# Altium PCB Sandshark 3D R1.0.PcbDoc (part 2 of 2)
Units mil, origin at the board's own origin, x right, y up, seen from the top; angles counter-clockwise.
Board outline 4143.89 x 2810.03 mil, 5 copper layers (Top Layer, Mid-Layer 1, Groun Plane, Power Plane, Bottom Layer), stack 75.73 mil thick; 278 components, 166 nets, 866 pads, 200 vias.
Unrouted connection lines stored in the file: 346.
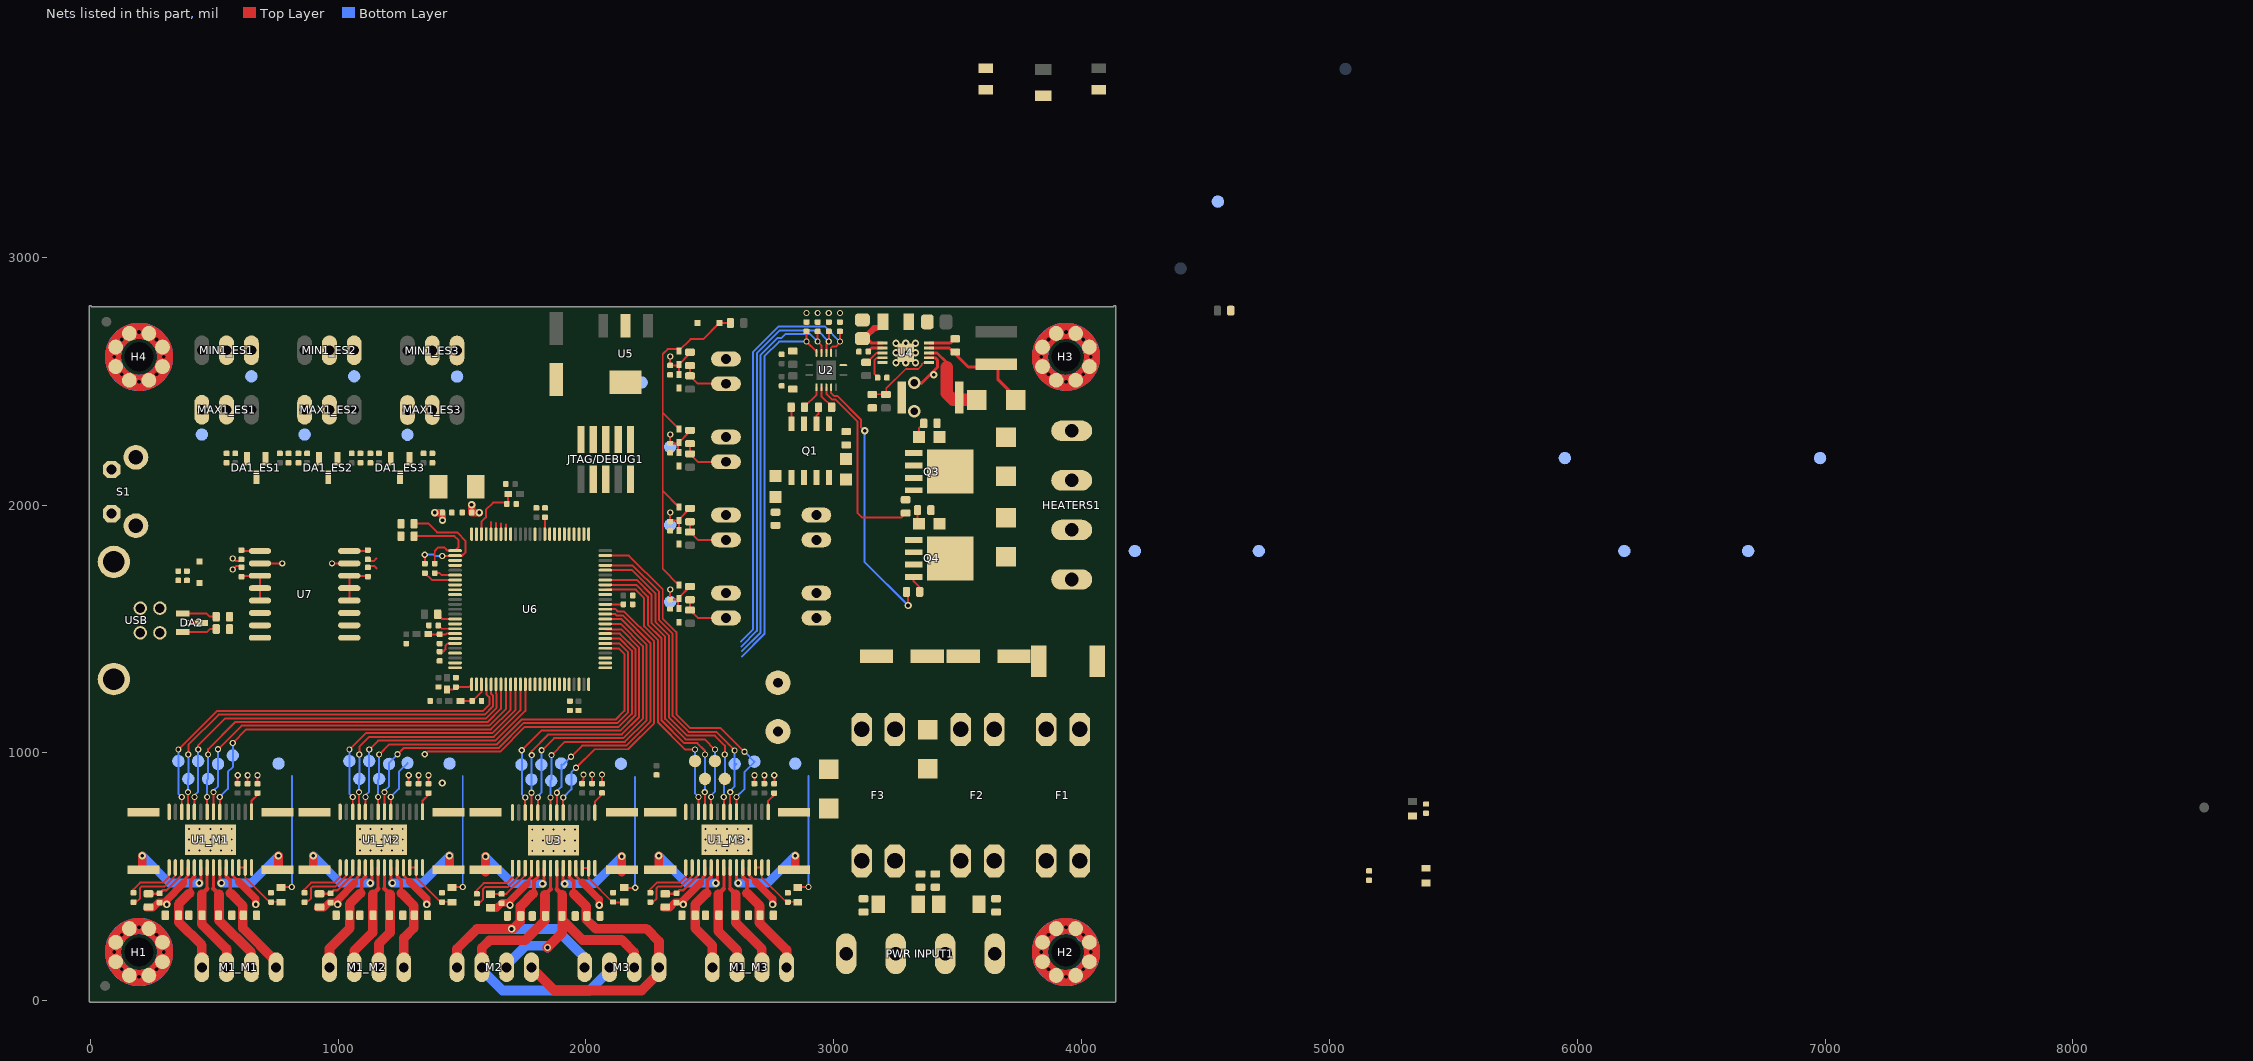
[diagram p4: the nets of this part, all layers, seen from the top]

## Via types
v1: diameter 25, hole 15, Top Layer to Bottom Layer, 91 vias
v2: diameter 19.68, hole 7.87, Top Layer to Bottom Layer, 64 vias
v3: diameter 30, hole 15, Top Layer to Bottom Layer, tented both sides, 34 vias
v4: diameter 30, hole 15, Top Layer to Bottom Layer, 9 vias
v5: diameter 50, hole 30, Top Layer to Bottom Layer, 2 vias

## Nets (pads, with @x,y where several pads share a name; then routed paths per layer and width w, separated by ;. In a path a pad name is that pad's centre, name@x,y a point inside that pad or via, vN(x,y) a via of type N, cw(c..) or ccw(c..) an arc to the next point about the centre after c; other vN are vias at no path point) (continued)
+12VCC1: C3_M1.2 C3_M2.2 C3_M3.2 C17.1 C66.1 D25.C F3.2 R3_M1.2 R3_M2.2 R3_M3.2 R19.2 U1_M1.4 U1_M1.11 U1_M2.4 U1_M2.11 U1_M3.4 U1_M3.11 U3.4 U3.11 | length 1866.1
  Top Layer w12: 375.51,473.74 384.51,482.74 384.51,494.25 394.69,504.42 394.69,536.8 U1_M1.4@394.68,537.8 ; U1_M1.11@573.82,537.8 573.82,505.43 599.25,480 ; 1065.51,473.74 1074.51,482.74 1074.51,494.25 1084.69,504.42 1084.69,536.8 U1_M2.4@1084.68,537.8 ; U1_M2.11@1263.82,537.8 1263.82,505.43 1289.25,480 ; 1761.26,471.38 1770.26,480.38 1770.26,491.89 1780.43,502.06 1780.43,534.43 U3.4@1780.43,535.43 ; U3.11@1959.57,535.43 1959.57,503.07 1985,477.64 ; 2460.51,473.74 2469.51,482.74 2469.51,494.25 2479.69,504.42 2479.69,536.8 U1_M3.4@2479.68,537.8 ; U1_M3.11@2658.82,537.8 2658.82,505.43 2684.25,480
  Top Layer w30: C3_M1.2@227.99,376.18 252.95,376.18 275.51,398.74 297.99,398.74 v3(307.99,388.74) 307.99,406.22 375.51,473.74 ; 599.25,480 667.99,411.26 v3(667.99,388.74) ; C3_M2.2@917.99,376.18 942.95,376.18 965.51,398.74 987.99,398.74 v3(997.99,388.74) 997.99,406.22 1065.51,473.74 ; 1289.25,480 1357.99,411.26 v3(1357.99,388.74) ; C17.1@1613.74,373.82 1638.7,373.82 1661.26,396.38 1683.74,396.38 v3(1693.74,386.38) 1693.74,403.86 1761.26,471.38 ; 1985,477.64 2053.74,408.9 v3(2053.74,386.38) ; C3_M3.2@2312.99,376.18 2337.95,376.18 2360.51,398.74 2382.99,398.74 v3(2392.99,388.74) 2392.99,406.22 2460.51,473.74 ; 2684.25,480 2752.99,411.26 v3(2752.99,388.74)
+12VCC2: C27.1 C29.1 C65.1 D7.C D19.C F2.2 FAN-1.1 FAN-2.1 HEATERS1.4 R7.2 R10.2 R13.2 R23.2 U4.1 | length 128.2
  Top Layer w12: C29.1@3142.87,2662.95 3152.03,2653.8 U4.1@3196.02,2653.8
  Top Layer w24: C29.1@3115.51,2682.02 3130.36,2682.02 3162.77,2714.43 3173.35,2714.43
+12VCC3: C64.1 D10.C D17.C F1.2 HEATERS1.2 R16.2
AN1: C63_U_TR1.1 D23_U_TR1.A D24_U_TR1.C R44_U_TR1.1 TP26_U_TR1.1 | length 180.7
  Top Layer w8: v1(2340,2600) C63_U_TR1.1@2340,2563.7 2371.26,2563.7 D23_U_TR1.A@2375,2567.44 ; D24_U_TR1.C@2375,2527.56 D23_U_TR1.A@2375,2567.44 ; R44_U_TR1.1@2420,2616.77 2420,2612.44 D23_U_TR1.A@2375,2567.44
AN2: C63_U_TR2.1 D23_U_TR2.A D24_U_TR2.C R44_U_TR2.1 TP26_U_TR2.1 | length 167.9
  Top Layer w8: v1(2340,2285) C63_U_TR2.1@2340,2248.7 2371.26,2248.7 D24_U_TR2.C@2371.26,2216.3 ; D23_U_TR2.A@2375,2252.44 2420,2297.44 R44_U_TR2.1@2420,2301.77
AN3: C63_U_TR3.1 D23_U_TR3.A D24_U_TR3.C R44_U_TR3.1 TP26_U_TR3.1 | length 178.2
  Top Layer w8: v1(2340,1660) C63_U_TR3.1@2340,1618.7 2371.26,1618.7 2371.26,1586.3 D24_U_TR3.C@2375,1582.56 ; D23_U_TR3.A@2375,1622.44 2375,1626.77 R44_U_TR3.1@2420,1671.77
AN4: C63_U_TR4.1 D23_U_TR4.A D24_U_TR4.C R44_U_TR4.1 TP26_U_TR4.1 | length 180.7
  Top Layer w8: v1(2340,1970) C63_U_TR4.1@2340,1933.7 2343.74,1937.44 D23_U_TR4.A@2375,1937.44 ; D24_U_TR4.C@2375,1897.56 D23_U_TR4.A@2375,1937.44 ; R44_U_TR4.1@2420,1986.77 2375,1941.77 D23_U_TR4.A@2375,1937.44
DIR1: TP8_M1.1 U1_M1.20 U6.59 | length 1578.5
  Top Layer w8: U1_M1.20@522.64,762.2 v1(522.64,822.64) ; v1(575,1040) 630,1095 1616.21,1095 1696.26,1175.05 U6.59@1696.26,1276.85
  Bottom Layer w8: v1(522.64,822.64) 555.48,855.48 555.48,923.71 575,943.23 TP8_M1.1@575,990 v1(575,1040)
DIR2: TP8_M2.1 U1_M2.20 U6.82 | length 1509.9
  Top Layer w8: U1_M2.20@1212.64,762.2 v1(1212.64,822.64) ; v1(1350,995) 1360,1005 1653.64,1005 1753.64,1105 2132.43,1105 2185,1157.57 2185,1412.72 2135.83,1461.89 U6.82@2078.15,1461.89
  Bottom Layer w8: v1(1212.64,822.64) 1245.48,855.48 1245.48,923.71 TP8_M2.1@1280.89,959.11
DIR3: TP8_M3.1 U1_M3.20 U6.99 | length 1441.5
  Top Layer w8: U6.99@2078.15,1796.54 2173.46,1796.54 2310,1660 2310,1542.28 2365,1487.28 2365,1156.07 2421.07,1100 2543.23,1100 2638.23,1005 v1(2640,1005) ; U1_M3.20@2607.64,762.2 v1(2607.64,822.64)
  Bottom Layer w8: v1(2607.64,822.64) 2640.48,855.48 2640.48,923.71 TP8_M3.1@2680.89,964.11 ; v1(2640,1005) TP8_M3.1@2680,965
DIR_Z: TP21.1 U3.20 U6.88 | length 1173.5
  Top Layer w8: U3.20@1908.39,759.84 v1(1908.39,820.28) ; v1(1960,940) 2035,1015 2169.71,1015 2275,1120.29 2275,1450 2154.37,1570.63 2129.37,1570.63 2120,1580 U6.88@2078.15,1580
  Bottom Layer w8: v1(1908.39,820.28) 1941.23,853.12 1941.23,921.35 v1@1961.26,941.38
EN1: TP4_M1.1 U1_M1.21 U6.58 | length 1589.1
  Top Layer w8: U1_M1.21@497.05,762.2 v1(497.05,842.05) ; v1@515.48,1014.52 610.96,1110 1610,1110 1676.57,1176.57 U6.58@1676.57,1276.85
  Bottom Layer w8: v1(497.05,842.05) 497.05,847.34 515.48,865.77 TP4_M1.1@515.48,955.77 515.48,1014.52 v1(515,1015)
EN2: TP4_M2.1 U1_M2.21 U6.81 | length 1604
  Top Layer w8: U1_M2.21@1187.05,762.2 v1(1187.05,842.05) ; v1(1240,995) 1265,1020 1647.43,1020 1747.43,1120 2126.21,1120 2170,1163.79 2170,1406.51 2134.3,1442.2 U6.81@2078.15,1442.2
  Bottom Layer w8: v1(1187.05,842.05) 1187.05,847.34 1205.48,865.77 TP4_M2.1@1205.48,955.77 1205.48,960.48 v1(1240,995)
EN3: TP4_M3.1 U1_M3.21 U6.97 | length 1366.4
  Top Layer w8: U6.97@2078.15,1757.17 2187.69,1757.17 2295,1649.85 2295,1536.07 2350,1481.07 2350,1149.85 2414.85,1085 2526.21,1085 2575.51,1035.7 2575.51,1034.49 v1(2600,1010) ; U1_M3.21@2582.05,762.2 v1(2582.05,842.05)
  Bottom Layer w8: v1(2582.05,842.05) 2582.05,847.34 2600.48,865.77 TP4_M3.1@2600.48,955.77 ; v1(2600,1010) 2600,948.23 TP4_M3.1@2607.54,955.77
EN_Z: TP17.1 U3.21 U6.87 | length 1173.8
  Top Layer w8: U3.21@1882.8,759.84 v1(1882.8,839.68) ; v1(1940,985) 1985,1030 2163.49,1030 2260,1126.51 2260,1443.79 2148.16,1555.63 2123.16,1555.63 2118.47,1560.32 U6.87@2078.15,1560.32
  Bottom Layer w8: v1(1882.8,839.68) 1882.8,844.98 1901.23,863.41 TP17.1@1901.23,953.41 ; TP17.1@1908.29,953.41 v1@1941.26,986.38
EXP1_CS: U6.8
EXP2_CS: U6.9
FAN0_PWM: R9.2 U2.2 U6.49 | length 1546.1
  Top Layer w8: R9.2@2890,2701 v1(2890,2660) 2930.63,2619.37 U2.2@2930.63,2613.9
  Bottom Layer w8: 2630,1390 2720,1480 2720,2600 2780,2660 v1(2890,2660)
FAN1_PWM: R12.2 U2.3 U6.50 | length 1597.5
  Top Layer w8: R12.2@2935,2701 v1(2935,2660) 2950.32,2644.68 U2.3@2950.32,2613.9
  Bottom Layer w8: 2629.39,1410.61 2705,1486.21 2705,2606.21 2773.79,2675 2790,2675 2805,2690 2905,2690 v1(2935,2660)
FGND: D22.C H1.1 H2.1 H3.1 H4.1 S1.3 S1.4 | length 12
  Bottom Layer w40: 3862.76,122.6 H2.1@3867.01,126.85
  Bottom Layer w64.96: H2.1@4007.01,266.85 4011.25,271.1
GND: "PWR INPUT1.2" "PWR INPUT1.4" C1_ES1.2 C1_ES2.2 C1_ES3.2 C2_ES1.2 C2_ES2.2 C2_ES3.2 C5_M1.1 C5_M2.1 C5_M3.1 C6_M1.1 C6_M2.1 C6_M3.1 C7_M1.2 C7_M2.2 C7_M3.2 C8_M1.2 C8_M2.2 C8_M3.2 C9_M1.2 C9_M2.2 C9_M3.2 C10_M1.2 C10_M2.2 C10_M3.2 C11_M1.2 C11_M2.2 C11_M3.2 C12_M1.2 C12_M2.2 C12_M3.2 C13.1 C14.1 C15.1 C16.1 C19.1 C20.2 C21.2 C22.2 C23.2 C24.2 C25.2 C26.2 C27.2 C29.2 C30.2 C31.2 C32.2 C33.2 C34.1 C36.1 C37.1 C38.2 C40.1 C41.1 C42.1 C43.1 C44.1 C45.1 C46.1 C47.1 C48.1 C49.1 C50.1 C51.1 C52.1 C53.1 C54.1 C55.1 C56.1 C57.2 C58.2 C62.2 C63_U_TR1.2 C63_U_TR2.2 C63_U_TR3.2 C63_U_TR4.2 C64.2 C65.2 C66.2 C67.2 C68.2 C69.2 C70.2 D17.A D18.A D19.A D20.1 D24_U_TR1.A D24_U_TR2.A D24_U_TR3.A D24_U_TR4.A D25.A DA1_ES1.3 DA1_ES2.3 DA1_ES3.3 JTAG/DEBUG1.3 JTAG/DEBUG1.5 JTAG/DEBUG1.9 MAX1_ES1.2 MAX1_ES2.2 MAX1_ES3.2 MIN1_ES1.2 MIN1_ES2.2 MIN1_ES3.2 P2_U_TR1.2 P2_U_TR2.2 P2_U_TR3.2 P2_U_TR4.2 Q1.1 Q1.3 Q3.1 Q3.2 Q3.3 Q4.1 Q4.2 Q4.3 R5_M1.1 R5_M2.1 R5_M3.1 R6_M1.1 R6_M2.1 R6_M3.1 R9.1 R12.1 R15.1 R18.1 R21.1 R22.1 R26.1 R28.2 R35.1 S1.2 U1_M1.14 U1_M1.28 U1_M1.29 U1_M2.14 U1_M2.28 U1_M2.29 U1_M3.14 U1_M3.28 U1_M3.29 U2.7 U3.14 U3.28 U3.29 U4.5 U4.7 U4.11 U5.2 U5.4 U6.12 U6.22 U6.33 U6.35 U6.41 U6.44 U6.52 U6.73 U6.91 U7.9 U7.15 | length 861
  Top Layer w8: C11_M1.2@594.69,876.2 594.69,909.68 v1(595,910) ; C10_M1.2@634.69,876.2 634.69,909.68 v1(635,910) ; C5_M1.1@675,876.52 v1(675,910) ; v1(975,1765) U7.15@1045.12,1765 ; C57.2@1120,1749 1126,1755 1145,1755 1155,1745 ; C58.2@1120,1781 1126,1775 1145,1775 1155,1785 ; C11_M2.2@1284.69,876.2 1284.69,909.69 v1(1285,910) ; C10_M2.2@1324.69,876.2 1324.69,909.69 v1(1325,910) ; C5_M2.1@1365,876.52 v1(1365,910) ; C24.2@1985,876.64 1985,887.64 1990,892.64 v1(1990,912.64) ; C25.2@2025,876.64 v1(2025,912.64) ; C19.1@2065,876.34 v1(2065,912.64) ; C11_M3.2@2679.69,876.2 2679.69,909.69 v1(2680,910) ; C10_M3.2@2719.69,876.2 2719.69,909.69 v1(2720,910) ; C5_M3.1@2760,876.52 v1(2760,910)
  Top Layer w12: 3353.61,2491.41 3418.08,2555.87 3418.08,2586.35 3409.68,2594.74 U4.7@3385,2594.74 U4.7@3375.16,2594.74
  Top Layer w30: v3(1390,1970) C36.1@1421.3,1970 v3(1421.3,1938.7) ; v3(1538.7,2001.3) C37.1@1538.7,1970 v3(1570,1970)
  other v1: 2890,2775 2935,2775 2980,2775 3025,2775
  other v2: 1783.39,604.33 1826.69,604.33 1870,604.33 1913.31,604.33 1956.61,604.33 397.64,606.69 440.94,606.69 484.25,606.69 527.56,606.69 570.87,606.69 1087.64,606.69 1130.94,606.69 1174.25,606.69 1217.56,606.69 1260.87,606.69 2482.64,606.69 2525.94,606.69 2569.25,606.69 2612.56,606.69 2655.87,606.69 1783.39,647.64 1826.69,647.64 1870,647.64 1913.31,647.64 1956.61,647.64 397.64,650 440.94,650 484.25,650 527.56,650 570.87,650 1087.64,650 1130.94,650 1174.25,650 1217.56,650 1260.87,650 2482.64,650 2525.94,650 2569.25,650 2612.56,650 2655.87,650 1783.39,690.95 1826.69,690.95 1870,690.95 1913.31,690.95 1956.61,690.95 397.64,693.31 440.94,693.31 484.25,693.31 527.56,693.31 570.87,693.31 1087.64,693.31 1130.94,693.31 1174.25,693.31 1217.56,693.31 1260.87,693.31 2482.64,693.31 2525.94,693.31 2569.25,693.31 2612.56,693.31 2655.87,693.31
  other v3: 1420.51,878.74 3403.2,2526
  other v4: 3251.14,2575.06 3290.51,2575.06 3329.88,2575.06 3251.14,2614.43 3290.51,2614.43 3329.88,2614.43 3251.14,2653.8 3290.51,2653.8 3329.88,2653.8
  other v5: 3325.51,2379.43 3325.51,2494.43
HEATBED_PWM: R18.2 U2.5 U6.7 | length 1716.1
  Top Layer w8: U2.5@2989.69,2613.9 2989.69,2634.69 2995.65,2640.65 3010.65,2640.65 3025,2655 v1(3025,2660) R18.2@3025,2701
  Bottom Layer w8: 2626.36,1450 2675,1498.64 2675,2618.64 2776.36,2720 2965,2720 v1(3025,2660)
HEATER_PWM: R15.2 U2.4 U6.17 | length 1631.5
  Top Layer w8: U2.4@2970,2613.9 2970,2650 ; v1(2980,2660) R15.2@2980,2701
  Bottom Layer w8: 2628.18,1430.61 2690,1492.43 2690,2612.43 2782.57,2705 2935,2705 v1(2980,2660)
I2C_SCL: U6.65
I2C_SDA: U6.64
INPUT_GND: C59.2 C60.2 C61.1 DA2.3 R42.1 U7.2 U7.8 USB.4 | length 227.8
  Top Layer w8: v1(395,1525) DA2.3@447.4,1525 ; v1(575,1740) 590,1755 604,1755 C60.2@610,1749 ; v1(575,1785) 585,1775 600,1775 606,1781 C59.2@610,1781 ; U7.2@684.88,1765 v1(775,1765)
MAX_ES1: C2_ES1.1 DA1_ES1.2 MAX1_ES1.1 R2_ES1.1 TP2_ES1.1 U6.2
MAX_ES2: C2_ES2.1 DA1_ES2.2 MAX1_ES2.1 R2_ES2.1 TP2_ES2.1 U6.4
MAX_ES3: C2_ES3.1 DA1_ES3.2 MAX1_ES3.1 R2_ES3.1 TP2_ES3.1 U6.6
MIN_ES1: C1_ES1.1 DA1_ES1.1 MIN1_ES1.1 R1_ES1.1 TP1_ES1.1 U6.1
MIN_ES2: C1_ES2.1 DA1_ES2.1 MIN1_ES2.1 R1_ES2.1 TP1_ES2.1 U6.3
MIN_ES3: C1_ES3.1 DA1_ES3.1 MIN1_ES3.1 R1_ES3.1 TP1_ES3.1 U6.5
MOD0E1: TP7_M1.1 U1_M1.24 U6.56 | length 1637.6
  Top Layer w8: U1_M1.24@420.28,762.2 v1(420.28,822.64) ; v1(435.51,1013.74) 435.51,1030.51 545,1140 1597.57,1140 1640,1182.43 1640,1237.43 1637.2,1240.22 U6.56@1637.2,1276.85
  Bottom Layer w8: v1(420.28,822.64) 420.28,828.57 435.48,843.77 v1(435.51,1013.74)
MOD0E2: TP7_M2.1 U1_M2.24 U6.62 | length 1059
  Top Layer w8: U1_M2.24@1110.28,762.2 v1(1110.28,822.64) ; v1(1125.51,1013.74) 1161.77,1050 1635,1050 1755.32,1170.32 U6.62@1755.32,1276.85
  Bottom Layer w8: v1(1110.28,822.64) 1110.28,828.57 1125.48,843.77 v1(1125.51,1013.74)
MOD0E3: TP7_M3.1 U1_M3.24 U6.94 | length 1244.3
  Top Layer w8: U6.94@2078.15,1698.11 2204.32,1698.11 2265,1637.43 2265,1523.64 2320,1468.64 2320,1137.43 2402.43,1055 2479.25,1055 v1(2520.51,1013.74) ; U1_M3.24@2505.28,762.2 v1(2505.28,822.64)
  Bottom Layer w8: v1(2505.28,822.64) 2505.28,828.57 2520.48,843.77 v1(2520.51,1013.74)
MOD0E_Z: TP20.1 U3.24 U6.85 | length 1200.8
  Top Layer w8: U3.24@1806.02,759.84 v1(1806.02,820.28) ; v1(1821.26,1011.38) 1823.32,1011.38 1871.94,1060 2151.07,1060 2230,1138.93 2230,1431.36 2140.42,1520.94 U6.85@2078.15,1520.94
  Bottom Layer w8: v1(1806.02,820.28) 1806.02,826.2 1821.23,841.41 v1@1821.23,1011.35
MOD1E1: TP6_M1.1 U1_M1.25 U6.55 | length 1654.9
  Top Layer w8: U1_M1.25@394.68,762.2 v1(394.69,842.05) ; v1(395.51,993.74) 395.51,1032.53 517.99,1155 1591.21,1155 1625,1188.79 1625,1231.21 1617.52,1238.69 U6.55@1617.52,1276.85
  Bottom Layer w8: v1(394.69,842.05) TP6_M1.1@394.69,894.98 ; TP6_M1.1@395.48,895.77 v1(395.51,993.74)
MOD1E2: TP6_M2.1 U1_M2.25 U6.61 | length 1078.2
  Top Layer w8: U1_M2.25@1084.68,762.2 v1(1084.69,842.05) ; v1(1085.51,993.74) 1085.51,1025.51 1125,1065 1628.79,1065 1735.63,1171.84 U6.61@1735.63,1276.85
  Bottom Layer w8: v1(1084.69,842.05) TP6_M2.1@1084.69,894.98 ; TP6_M2.1@1085.48,895.77 v1(1085.51,993.74)
MOD1E3: TP6_M3.1 U1_M3.25 U6.93 | length 1186.6
  Top Layer w8: U6.93@2078.15,1678.43 2202.79,1678.43 2250,1631.21 2250,1517.43 2305,1462.43 2305,1131.21 2396.21,1040 2450,1040 2480.51,1009.49 v1(2480.51,993.74) ; U1_M3.25@2479.68,762.2 v1(2479.69,842.05)
  Bottom Layer w8: v1(2479.69,842.05) 2479.69,894.98 ; 2480.48,895.77 v1(2480.51,993.74)
MOD1E_Z: TP19.1 U3.25 U6.84 | length 1182
  Top Layer w8: U3.25@1780.43,759.84 v1(1780.43,839.68) ; v1(1781.26,991.38) 1781.26,1007.37 1848.89,1075 2144.85,1075 2215,1145.15 2215,1425.15 2141.67,1498.48 U6.84@2080.93,1498.48
  Bottom Layer w8: v1(1780.43,839.68) TP19.1@1780.43,892.61 ; TP19.1@1781.23,893.41 v1@1781.23,991.35
MOD2E1: TP5_M1.1 U1_M1.26 U6.54 | length 1673.6
  Top Layer w8: v1(355.51,1013.74) 511.77,1170 1585,1170 1610,1195 1610,1225 1597.83,1237.17 U6.54@1597.83,1276.85 ; U1_M1.26@369.09,762.2 v1(369.09,822.64)
  Bottom Layer w8: v1(355.51,1013.74) 355.48,836.25 v1(369.09,822.64)
MOD2E2: TP5_M2.1 U1_M2.26 U6.60 | length 1097.1
  Top Layer w8: v1(1045.51,1013.74) 1111.77,1080 1622.43,1080 1715.94,1173.52 U6.60@1715.94,1276.85 ; U1_M2.26@1059.09,762.2 v1(1059.09,822.64)
  Bottom Layer w8: v1(1045.51,1013.74) 1045.48,836.25 v1(1059.09,822.64)
MOD2E3: TP5_M3.1 U1_M3.26 U6.92 | length 1147.3
  Top Layer w8: U6.92@2078.15,1658.74 2201.26,1658.74 2235,1625 2235,1511.21 2290,1456.21 2290,1125 2401.26,1013.74 v1(2440.51,1013.74) ; U1_M3.26@2454.09,762.2 v1(2454.09,822.64)
  Bottom Layer w8: v1(2440.51,1013.74) 2440.48,836.25 v1(2454.09,822.64)
MOD2E_Z: TP18.1 U3.26 U6.83 | length 1189.2
  Top Layer w8: v1(1741.26,1011.38) 1819.88,1090 2138.64,1090 2200,1151.36 2200,1418.93 2137.36,1481.57 U6.83@2078.15,1481.57 ; U3.26@1754.84,759.84 v1(1754.84,820.28)
  Bottom Layer w8: v1@1741.23,1011.35 1741.23,833.89 v1(1754.84,820.28)
NetC3_M1_1: C3_M1.1 R3_M1.1 U1_M1.3 | length 192.4
  Top Layer w10: C3_M1.1@235,431.77 R3_M1.1@277.87,431.77 ; R3_M1.1@280,433.9 291.86,445.76 306.72,445.76 369.09,508.13 U1_M1.3@369.09,537.8
NetC3_M2_1: C3_M2.1 R3_M2.1 U1_M2.3 | length 192.4
  Top Layer w10: C3_M2.1@925,431.77 R3_M2.1@967.87,431.77 ; R3_M2.1@970,433.9 981.86,445.76 996.72,445.76 1059.09,508.13 U1_M2.3@1059.09,537.8
NetC3_M3_1: C3_M3.1 R3_M3.1 U1_M3.3 | length 192.4
  Top Layer w10: C3_M3.1@2320,431.77 R3_M3.1@2362.87,431.77 ; R3_M3.1@2365,433.9 2376.86,445.76 2391.72,445.76 2454.09,508.13 U1_M3.3@2454.09,537.8
NetC4_M1_1: C4_M1.1 U1_M1.1 | length 219.5
  Top Layer w8: C4_M1.1@172.99,432.44 172.99,448.31 201.44,476.76 293.88,476.76 317.91,500.79 U1_M1.1@317.91,537.8
NetC4_M1_2: C4_M1.2 U1_M1.2 | length 273.2
  Top Layer w8: C4_M1.2@172.99,394.74 182.22,394.74 199.69,412.2 199.69,453.78 207.66,461.76 300.1,461.76 343.5,505.16 U1_M1.2@343.5,537.8
NetC4_M2_1: C4_M2.1 U1_M2.1 | length 219.5
  Top Layer w8: C4_M2.1@862.99,432.44 862.99,448.31 891.44,476.76 983.88,476.76 1007.91,500.79 U1_M2.1@1007.91,537.8
NetC4_M2_2: C4_M2.2 U1_M2.2 | length 273.2
  Top Layer w8: C4_M2.2@862.99,394.74 872.22,394.74 889.69,412.2 889.69,453.79 897.66,461.76 990.1,461.76 1033.5,505.16 U1_M2.2@1033.5,537.8
NetC4_M3_1: C4_M3.1 U1_M3.1 | length 219.5
  Top Layer w8: C4_M3.1@2257.99,432.44 2257.99,448.31 2286.44,476.76 2378.88,476.76 2402.91,500.79 U1_M3.1@2402.91,537.8
NetC4_M3_2: C4_M3.2 U1_M3.2 | length 273.2
  Top Layer w8: C4_M3.2@2257.99,394.74 2267.22,394.74 2284.69,412.2 2284.69,453.79 2292.66,461.76 2385.1,461.76 2428.5,505.16 U1_M3.2@2428.5,537.8
NetC5_M1_2: C5_M1.2 U1_M1.15 | length 88.9
  Top Layer w8: U1_M1.15@650.59,762.2 650.59,806.34 677.99,833.74 C5_M1.2@677.99,839.74
NetC5_M2_2: C5_M2.2 U1_M2.15 | length 88.9
  Top Layer w8: U1_M2.15@1340.59,762.2 1340.59,806.34 1367.99,833.74 C5_M2.2@1367.99,839.74
NetC5_M3_2: C5_M3.2 U1_M3.15 | length 88.9
  Top Layer w8: U1_M3.15@2735.59,762.2 2735.59,806.34 2762.99,833.74 C5_M3.2@2762.99,839.74
NetC6_M1_2: C6_M1.2 R4_M1.1 TP3_M1.1 U1_M1.12 U1_M1.13 | length 255
  Top Layer w7: U1_M1.12@599.41,537.8 U1_M1.13@625,537.8 625,496.73 722.52,399.21 R4_M1.1@772.99,399.21
NetC6_M2_2: C6_M2.2 R4_M2.1 TP3_M2.1 U1_M2.12 U1_M2.13 | length 255
  Top Layer w7: U1_M2.12@1289.41,537.8 U1_M2.13@1315,537.8 1315,496.73 1412.52,399.21 R4_M2.1@1462.99,399.21
NetC6_M3_2: C6_M3.2 R4_M3.1 TP3_M3.1 U1_M3.12 U1_M3.13 | length 255
  Top Layer w7: U1_M3.12@2684.41,537.8 U1_M3.13@2710,537.8 2710,496.73 2807.52,399.21 R4_M3.1@2857.99,399.21
NetC7_M1_1: C7_M1.1 M1_M1.4 U1_M1.5 | length 468
  Top Layer w12: 420.28,501.02 U1_M1.5@420.28,537.8
  Top Layer w15: 401.25,434.48 405.01,438.24 405.01,485.76 420.28,501.02
  Top Layer w39: 401.25,434.48 356.41,389.64 356.41,317.75 450,224.16 M1_M1.4@450,135
NetC7_M2_1: C7_M2.1 M1_M2.4 U1_M2.5 | length 463
  Top Layer w12: 1110.28,501.02 U1_M2.5@1110.28,537.8
  Top Layer w15: 1091.25,434.48 1095.01,438.24 1095.01,485.76 1110.28,501.02
  Top Layer w39: M1_M2.4@965,135 965,210.75 1046.41,292.16 1046.41,389.64 1091.25,434.48
NetC7_M3_1: C7_M3.1 M1_M3.4 U1_M3.5 | length 457.7
  Top Layer w12: 2505.28,501.02 U1_M3.5@2505.28,537.8
  Top Layer w15: 2486.25,434.48 2490.01,438.24 2490.01,485.76 2505.28,501.02
  Top Layer w39: 2486.25,434.48 2441.41,389.64 2441.41,292.16 2510,223.57 M1_M3.4@2510,135
NetC8_M1_1: C8_M1.1 M1_M1.3 U1_M1.7 | length 453.7
  Top Layer w12: 471.46,452.2 U1_M1.7@471.46,537.8
  Top Layer w18: 449.25,430 471.46,452.2
  Top Layer w39: 449.25,430 449.25,310 550,209.25 M1_M1.3@550,135
NetC8_M2_1: C8_M2.1 M1_M2.3 U1_M2.7 | length 442.7
  Top Layer w12: 1161.46,452.2 U1_M2.7@1161.46,537.8
  Top Layer w18: 1139.25,430 1161.46,452.2
  Top Layer w39: M1_M2.3@1065,135 1065,200.75 1139.25,275 1139.25,430
NetC8_M3_1: C8_M3.1 M1_M3.3 U1_M3.7 | length 443.4
  Top Layer w12: 2556.46,452.2 U1_M3.7@2556.46,537.8
  Top Layer w18: 2534.25,430 2556.46,452.2
  Top Layer w39: 2534.25,430 2534.25,279.95 2610,204.2 M1_M3.3@2610,135
NetC9_M1_1: C9_M1.1 M1_M1.1 U1_M1.10 | length 486.4
  Top Layer w12: 548.23,501.02 U1_M1.10@548.23,537.8
  Top Layer w15: 548.23,501.02 565.25,484 565.25,434
  Top Layer w39: 565.25,434 615.25,384 615.25,294 750,159.25 M1_M1.1@750,135
NetC9_M2_1: C9_M2.1 M1_M2.1 U1_M2.10 | length 447.2
  Top Layer w12: 1238.23,501.02 U1_M2.10@1238.23,537.8
  Top Layer w15: 1238.23,501.02 1255.25,484 1255.25,434
  Top Layer w39: 1255.25,434 1305.25,384 1305.25,294 1265,253.75 M1_M2.1@1265,135
NetC9_M3_1: C9_M3.1 M1_M3.1 U1_M3.10 | length 476
  Top Layer w12: 2633.23,501.02 U1_M3.10@2633.23,537.8
  Top Layer w15: 2633.23,501.02 2650.25,484 2650.25,434
  Top Layer w39: 2650.25,434 2700.25,384 2700.25,314.75 2810,205 M1_M3.1@2810,135
NetC12_M1_1: C12_M1.1 M1_M1.2 U1_M1.8 | length 466.2
  Top Layer w12: 497.05,452.2 U1_M1.8@497.05,537.8
  Top Layer w18: 497.05,452.2 519.25,430
  Top Layer w39: 519.25,430 519.25,324.95 650,194.2 M1_M1.2@650,135
NetC12_M2_1: C12_M2.1 M1_M2.2 U1_M2.8 | length 430.3
  Top Layer w12: 1187.05,452.2 U1_M2.8@1187.05,537.8
  Top Layer w18: 1187.05,452.2 1209.25,430
  Top Layer w39: M1_M2.2@1165,135 1165,230.75 1209.25,275 1209.25,430
NetC12_M3_1: C12_M3.1 M1_M3.2 U1_M3.8 | length 455.8
  Top Layer w12: 2582.05,452.2 U1_M3.8@2582.05,537.8
  Top Layer w18: 2582.05,452.2 2604.25,430
  Top Layer w39: 2604.25,430 2604.25,315.75 2710,210 M1_M3.2@2710,135
NetC17_2: C17.2 R19.1 U3.3 | length 201.8
  Top Layer w8: C17.2@1613.74,428.94 1616.18,431.38 1679.04,431.38 1754.84,507.18 U3.3@1754.84,535.43
NetC18_1: C18.1 U3.1 | length 219.5
  Top Layer w8: C18.1@1558.74,430.08 1558.74,445.94 1587.19,474.39 1679.63,474.39 1703.66,498.42 U3.1@1703.66,535.43
NetC18_2: C18.2 U3.2 | length 273.2
  Top Layer w8: C18.2@1558.74,392.38 1567.97,392.38 1585.43,409.84 1585.43,451.42 1593.4,459.39 1685.84,459.39 1729.25,502.8 U3.2@1729.25,535.43
NetC19_2: C19.2 U3.15 | length 88.9
  Top Layer w8: U3.15@2036.34,759.84 2036.34,803.98 2063.74,831.38 C19.2@2063.74,837.38
NetC20_1: C20.1 R20.1 TP16.1 U3.12 U3.13 | length 255
  Top Layer w7: U3.12@1985.16,535.43 U3.13@2010.75,535.43 2010.75,494.37 2108.27,396.85 R20.1@2158.74,396.85
NetC21_1: C21.1 M2.4 M3.4 U3.5 | length 1003.1
  Top Layer w12: 1806.02,498.66 U3.5@1806.02,535.43
  Top Layer w15: 1787,432.12 1790.76,435.88 1790.76,483.4 1806.02,498.66
  Top Layer w39: M2.4@1480,135 1480,210 1560,290 1705,290 1735,320 1735,368.95 1735.24,369.19 1735.24,380.36 1787,432.12
  Bottom Layer w39: v3(1700,290) 1880,290 1995,175 M3.4@1995,135
NetC22_1: C22.1 M2.3 M3.3 U3.7 | length 1205.8
  Top Layer w12: 1857.2,449.84 U3.7@1857.2,535.43
  Top Layer w18: 1835,427.64 1857.2,449.84
  Top Layer w39: M2.3@1580,135 1580,214 1610,244 1754,244 1835,325 1835,427.64
  Bottom Layer w39: M2.3@1580,135 1580,125.1 1663.6,41.5 2015,41.5 2095,121.5 M3.3@2095,135
NetC23_1: C23.1 M2.1 M3.1 U3.10 | length 1276.3
  Top Layer w12: 1933.98,498.66 U3.10@1933.98,535.43
  Top Layer w15: 1933.98,498.66 1951,481.64 1951,431.64
  Top Layer w39: M2.1@1780,135 1873.5,41.5 2225,41.5 2295,111.5 M3.1@2295,135 2295,240 2244,291 2039,291 2001,329 2001,381.64 1951,431.64
NetC26_1: C26.1 M2.2 M3.2 U3.8 | length 968.1
  Top Layer w12: 1882.8,449.84 U3.8@1882.8,535.43
  Top Layer w18: 1882.8,449.84 1905,427.64
  Top Layer w39: v3(1845,215) 1905,275 C26.1@1905,326.09 ; 1905,427.64 C26.1@1905,326.09 ; M3.2@2195,135 2195,195 2145,245 1986.09,245 C26.1@1905,326.09
  Bottom Layer w39: M2.2@1680,135 1680,144.9 1756.6,221.5 1838.5,221.5 v3(1845,215)
NetC28_1: C28.1 U4.10 | length 93.4
  Top Layer w12: U4.10@3385,2653.8 3469.99,2653.8 C28.1@3475.97,2659.77
NetC28_2: C28.2 D15.C L1.1 U4.9 | length 475.6
  Top Layer w12: U4.9@3385,2634.11 3466.31,2634.11 3494.2,2606.23 3543.17,2557.26 3662.2,2557.26 3662.2,2507.74 D15.C@3744.94,2425
NetC32_1: C32.1 U4.4 | length 112
  Top Layer w8: C32.1@3178.5,2515 3163.72,2529.78 3163.72,2584.29 3174.17,2594.74 U4.4@3196.02,2594.74
NetC36_2: C36.2 U6.25 X1.1
NetC37_2: C37.2 U6.24 X1.2
NetC38_1: C38.1 R35.2 U6.29
NetC40_2: C40.2 FB1.1 U6.53 | length 130.6
  Top Layer w8: FB1.1@1493.62,1210 C40.2@1541,1210 1542.72,1210 1578.15,1245.43 U6.53@1578.15,1276.85
NetC42_2: C42.2 C43.2 C44.2 C45.2 C46.2 U6.10 U6.34 U6.42 U6.45 U6.71 U6.89 | length 299.2
  Top Layer w8: C44.2@1404,1515 1417.74,1501.26 U6.42@1471.85,1501.26 ; C43.2@1410,1409 1424,1409 1433,1418 1433,1433 1442.2,1442.2 U6.45@1471.85,1442.2 ; U6.10@1834.06,1883.15 1834.06,1950.06 C42.2@1835,1951 ; U6.89@2078.15,1599.68 2150.68,1599.68 C46.2@2151,1600
NetC51_2: C51.2 FB2.1 U6.51 | length 107.3
  Top Layer w8: FB2.1@1440,1256.38 1465.38,1256.38 C51.2@1475,1266 1527.93,1266 U6.51@1538.78,1276.85
NetC54_2: C54.2 FB3.2 U6.43 | length 108.3
  Top Layer w8: FB3.2@1364.62,1479 C54.2@1410,1479 1434,1479 1436.57,1481.57 U6.43@1471.85,1481.57
NetC56_2: C56.2 FB4.2 U6.23 | length 250.1
  Top Layer w8: U6.23@1578.15,1883.15 1578.15,1933.15 1596,1951 1596,1980.77 1595.88,1980.88 1625.38,2010.38 C56.2@1686.38,2010.38 ; C56.2@1681,2005 C56.2@1686.38,2010.38 ; FB4.2@1686.38,2045 C56.2@1686.38,2010.38
NetC57_1: C57.1 U7.12 U7.13 U7.14 | length 176.4
  Top Layer w8: U7.12@1045.12,1615 U7.13@1045.12,1665 U7.14@1045.12,1715 1116.3,1715 C57.1@1120,1711.3
NetC59_1: C59.1 U7.1 USB.1 | length 76.4
  Top Layer w8: C59.1@610,1818.7 613.7,1815 U7.1@684.88,1815
NetC60_1: C60.1 U7.3 U7.4 U7.5 | length 176.4
  Top Layer w8: C60.1@610,1711.3 613.7,1715 U7.3@684.88,1715 U7.4@684.88,1665 U7.5@684.88,1615
NetC61_2: C61.2 D22.A R42.2 USB.P$1 USB.P$2
NetC67_1: "PWR INPUT1.3" C67.1 C69.1 FB5.1 FB6.1
NetC68_1: C68.1 F2.1 FB5.2
NetC70_1: C70.1 F3.1 FB6.2
NetD5_A: D5.A R7.1
NetD5_C: D5.C FAN-1.2 Q1.7
NetD6_A: D6.A R10.1
NetD6_C: D6.C FAN-2.2 Q1.5
NetD7_A: D7.A D8.C HEATERS1.3 Q3.5 TP12.1
NetD8_A: D8.A R13.1 | length 63.1
  Top Layer w8: D8.A@3343.66,2275 3343.66,2310.43 R13.1@3363.23,2330
NetD9_A: D9.A R16.1 | length 57.3
  Top Layer w8: R16.1@3338.23,1980 3338.23,1930.43 D9.A@3343.66,1925
NetD9_C: D9.C D10.A HEATERS1.1 Q4.5 TP14.1
NetD15_A: D15.A R26.2 U4.8 | length 341.9
  Top Layer w12: U4.8@3385,2614.43 3416.87,2614.43 3456.08,2575.22 3456.08,2556
  Top Layer w50: 3456.08,2556 3456.08,2451.26 3481.34,2426 3496.34,2426 D15.A@3576.2,2426
NetD18_C: D18.C D23_U_TR1.C D23_U_TR2.C D23_U_TR3.C D23_U_TR4.C R29.1 TP24.1 | length 1470.8
  Top Layer w8: 2311.28,2056.28 D23_U_TR4.C@2375,1992.56 ; 2311.28,2371.28 D23_U_TR2.C@2375,2307.56 ; D23_U_TR3.C@2375,1677.56 2310,1742.56 2310,2610 2330,2630 2367.56,2630 D23_U_TR1.C@2375,2622.56 2422.44,2670 2473.31,2670 D18.C@2538.31,2735 R29.1@2583.23,2735
NetD20_2: D20.2 R30.1
NetF1_1: "PWR INPUT1.1" F1.1
NetP2_U_TR1_1: P2_U_TR1.1 R43_U_TR1.1 R44_U_TR1.2 | length 199.6
  Top Layer w8: R44_U_TR1.2@2420,2563.23 R43_U_TR1.1@2420,2521.77 2451.77,2490 P2_U_TR1.1@2565,2490
NetP2_U_TR2_1: P2_U_TR2.1 R43_U_TR2.1 R44_U_TR2.2 | length 186.4
  Top Layer w8: R44_U_TR2.2@2420,2235 R43_U_TR2.1@2420,2206.77 2451.77,2175 P2_U_TR2.1@2565,2175
NetP2_U_TR3_1: P2_U_TR3.1 R43_U_TR3.1 R44_U_TR3.2 | length 199.6
  Top Layer w8: R44_U_TR3.2@2420,1618.23 R43_U_TR3.1@2420,1576.77 2451.77,1545 P2_U_TR3.1@2565,1545
NetP2_U_TR4_1: P2_U_TR4.1 R43_U_TR4.1 R44_U_TR4.2 | length 199.6
  Top Layer w8: R44_U_TR4.2@2420,1933.23 R43_U_TR4.1@2420,1891.77 2451.77,1860 P2_U_TR4.1@2565,1860
NetQ1_2: Q1.2 R8.2 | length 70.1
  Top Layer w8: Q1.2@2930,2328.27 2930,2360 2938.23,2368.23 R8.2@2938.23,2395
NetQ1_4: Q1.4 R11.2 | length 65
  Top Layer w8: Q1.4@2830,2328.27 R11.2@2830,2393.22
NetQ3_4: Q3.4 R14.2
NetQ4_4: Q4.4 R17.2 | length 70
  Top Layer w8: Q4.4@3322.64,1710 3322.64,1692.36 3346.77,1668.23 R17.2@3346.77,1650
NetR5_M1_2: R5_M1.2 U1_M1.9 | length 397.2
  Top Layer w12: U1_M1.9@522.64,537.8 522.64,481.61 v3(529.25,475)
  Top Layer w35: R5_M1.2@759.25,528.86 v3(759.25,585)
  Bottom Layer w35: v3(529.25,475) 649.25,475 v3(759.25,585)
NetR5_M2_2: R5_M2.2 U1_M2.9 | length 397.2
  Top Layer w12: U1_M2.9@1212.64,537.8 1212.64,481.61 v3(1219.25,475)
  Top Layer w35: R5_M2.2@1449.25,528.86 v3(1449.25,585)
  Bottom Layer w35: v3(1219.25,475) 1339.25,475 v3(1449.25,585)
NetR5_M3_2: R5_M3.2 U1_M3.9 | length 397.2
  Top Layer w12: U1_M3.9@2607.64,537.8 2607.64,481.61 v3(2614.25,475)
  Top Layer w35: R5_M3.2@2844.25,528.86 v3(2844.25,585)
  Bottom Layer w35: v3(2614.25,475) 2734.25,475 v3(2844.25,585)
NetR6_M1_2: R6_M1.2 U1_M1.6 | length 397.2
  Top Layer w12: v3(439.25,475) 445.87,481.61 U1_M1.6@445.87,537.8
  Top Layer w35: R6_M1.2@209.25,528.86 v3(209.25,585)
  Bottom Layer w35: v3(209.25,585) 319.25,475 v3(439.25,475)
NetR6_M2_2: R6_M2.2 U1_M2.6 | length 397.2
  Top Layer w12: v3(1129.25,475) 1135.87,481.61 U1_M2.6@1135.87,537.8
  Top Layer w35: R6_M2.2@899.25,528.86 v3(899.25,585)
  Bottom Layer w35: v3(899.25,585) 1009.25,475 v3(1129.25,475)
NetR6_M3_2: R6_M3.2 U1_M3.6 | length 397.2
  Top Layer w12: v3(2524.25,475) 2530.87,481.61 U1_M3.6@2530.87,537.8
  Top Layer w35: R6_M3.2@2294.25,528.86 v3(2294.25,585)
  Bottom Layer w35: v3(2294.25,585) 2404.25,475 v3(2524.25,475)
NetR8_1: R8.1 TP10.1 U2.12 | length 98.3
  Top Layer w8: U2.12@2950.32,2476.1 2950.32,2439.68 2991.77,2398.23 R8.1@2991.77,2395
NetR11_1: R11.1 TP11.1 U2.13 | length 101.3
  Top Layer w8: R11.1@2881.77,2395 2881.77,2396.77 2930.63,2445.63 U2.13@2930.63,2476.1
NetR14_1: R14.1 TP13.1 U2.11 | length 776.4
  Top Layer w8: U2.11@2970,2476.1 2970,2450 2994.32,2425.68 3007.48,2425.68 3095,2338.16 3095,1970 3115,1950 3271.77,1950 R14.1@3290,1968.23
NetR17_1: R17.1 TP15.1 U2.10 | length 1075.2
  Top Layer w8: U2.10@2989.69,2476.1 2989.69,2451.53 3000.53,2440.68 3013.69,2440.68 3110,2344.37 3110,2315 v3(3125,2300) ; R17.1@3293.23,1650 3300,1643.23 v3(3300,1595)
  Bottom Layer w8: v3(3125,2300) 3125,1770 v3(3300,1595)
NetR21_2: R21.2 U3.9 | length 404.1
  Top Layer w12: U3.9@1908.39,535.43 1908.39,479.25 v3(1915,472.64)
  Top Layer w35: R21.2@2145,519.69 v3(2145,582.64)
  Bottom Layer w35: v3(1915,472.64) 2035,472.64 v3(2145,582.64)
NetR22_2: R22.2 U3.6 | length 404.1
  Top Layer w12: v3(1825,472.64) 1831.61,479.25 U3.6@1831.61,535.43
  Top Layer w35: R22.2@1595,519.69 v3(1595,582.64)
  Bottom Layer w35: v3(1595,582.64) 1705,472.64 v3(1825,472.64)
NetR23_1: R23.1 U4.2 | length 56.9
  Top Layer w12: R23.1@3142.87,2625.05 3151.93,2634.11 U4.2@3196.02,2634.11
NetR25_1: R25.1 U4.3 | length 69.1
  Top Layer w8: R25.1@3140.34,2582.14 3172.62,2614.43 U4.3@3196.02,2614.43
NetR27_2: R27.2 R28.1 U4.6 | length 290.4
  Top Layer w7: R28.1@3148.56,2447.6 R27.2@3204.65,2447.6 ; R27.2@3212.2,2455.15 3212.2,2471.67 3290.08,2549.56 3340.44,2549.56 3355.38,2564.49 3355.38,2568.18 3362.25,2575.06 U4.6@3385,2575.06
NetR31_2: R31.2 U6.31 | length 85.2
  Top Layer w8: R31.2@1390,1726 1410,1726 1418.2,1717.8 U6.31@1471.85,1717.8
NetR32_2: R32.2 U6.32 | length 133.4
  Top Layer w8: R32.2@1350,1726 1377.89,1698.11 U6.32@1471.85,1698.11
NetR34_2: R34.2 U6.40 | length 78.1
  Top Layer w8: R34.2@1401.77,1560 1421.15,1540.63 U6.40@1471.85,1540.63
R_N: DA2.1 R38.2 USB.2 | length 138
  Top Layer w8: DA2.1@372.6,1562.4 469.88,1562.4 482.28,1550 R38.2@505.47,1550
R_P: DA2.2 R40.2 USB.3 | length 138
  Top Layer w8: DA2.2@372.6,1487.6 469.88,1487.6 482.28,1500 R40.2@505.47,1500
REF1: R4_M1.2 U6.66 | length 487
  Top Layer w8: R4_M1.2@772.99,458.27 v1@812.52,458.27
  Bottom Layer w8: v1(812.99,458.74) 812.99,906.26
REF2: R4_M2.2 U6.67 | length 487
  Top Layer w8: R4_M2.2@1462.99,458.27 v1@1502.52,458.27
  Bottom Layer w8: v1(1502.99,458.74) 1502.99,906.26
REF3: R4_M3.2 U6.63 | length 487
  Top Layer w8: R4_M3.2@2857.99,458.27 v1@2897.52,458.27
  Bottom Layer w8: v1(2897.99,458.74) 2897.99,906.26
REF_Z: R20.2 U6.68 | length 487
  Top Layer w8: R20.2@2158.74,455.91 v1@2198.27,455.91
  Bottom Layer w8: v1(2198.74,456.38) 2198.74,903.9
RESET: C62.1 JTAG/DEBUG1.10 R41.1 S1.1 U6.47
RX2: U6.69
SPI0_CS0: U6.76
SPI0_MISO: U6.75
SPI0_MOSI: U6.78
SPI0_SCLK: U6.77
STEP1: TP9_M1.1 U1_M1.22 U6.57 | length 1589.1
  Top Layer w8: U1_M1.22@471.46,762.2 v1(471.46,822.64) ; v1(475.51,993.74) 475.51,1015.51 585,1125 1603.79,1125 1656.89,1178.1 U6.57@1656.89,1276.85
  Bottom Layer w8: v1@471.25,822.84 v1(471.46,822.64) TP9_M1.1@471.46,891.75 ; TP9_M1.1@475.48,895.77 v1@475.48,985.77
STEP2: TP9_M2.1 U1_M2.22 U6.80 | length 1598.7
  Top Layer w8: U1_M2.22@1161.46,762.2 v1(1161.46,822.64) ; v1(1165.51,993.74) 1206.77,1035 1641.21,1035 1741.21,1135 2120,1135 2155,1170 2155,1400.29 2132.77,1422.52 U6.80@2078.15,1422.52
  Bottom Layer w8: v1@1161.25,822.84 v1(1161.46,822.64) TP9_M2.1@1161.46,891.75 ; TP9_M2.1@1165.48,895.77 v1@1165.48,985.77
STEP3: TP9_M3.1 U1_M3.22 U6.96 | length 1291.9
  Top Layer w8: U6.96@2078.15,1737.48 2186.16,1737.48 2280,1643.64 2280,1529.85 2335,1474.85 2335,1143.64 2408.64,1070 2520,1070 2560.51,1029.49 v1(2560.51,993.74) ; U1_M3.22@2556.46,762.2 v1(2556.46,822.64)
  Bottom Layer w8: v1@2556.25,822.84 v1(2556.46,822.64) 2556.46,891.75 ; 2560.48,895.77 v1@2560.48,985.77
STEP_Z: TP22.1 U3.22 U6.86 | length 1176.5
  Top Layer w8: U3.22@1857.2,759.84 v1(1857.2,820.28) ; v1(1861.26,991.38) 1914.88,1045 2157.28,1045 2245,1132.72 2245,1437.57 2141.94,1540.63 U6.86@2078.15,1540.63
  Bottom Layer w8: v1@1857,820.48 v1(1857.2,820.28) TP22.1@1857.2,889.39 ; TP22.1@1861.23,893.41 v1@1861.23,983.41
TCK/SWDCLK: JTAG/DEBUG1.4 U6.18 | length 38.4
  Top Layer w8: U6.18@1676.57,1883.15 1676.57,1921.57
TDI: JTAG/DEBUG1.8 U6.19 | length 43.7
  Top Layer w8: U6.19@1656.89,1883.15 1656.89,1926.89
TDO/SWO: JTAG/DEBUG1.6 U6.20 | length 45.3
  Top Layer w8: U6.20@1637.2,1883.15 1637.2,1928.42
TMS/SWDIO: JTAG/DEBUG1.2 U6.21 | length 49.4
  Top Layer w8: U6.21@1617.52,1883.15 1617.52,1932.52
TX2: U6.70
UD_N: R38.1 U7.6
UD_P: R40.1 U7.7
UI_N: R39.2 U7.11
UI_P: R37.2 U7.10
UMCU_N: R32.1 R39.1 U6.27 | length 491.6
  Top Layer w8: R39.1@1306.77,1925 1365,1925 1399.99,1890 1480,1890 1515,1855 1515,1810 1500,1795 v1(1420,1795) ; R32.1@1350,1763.9 v1(1350,1800)
  Bottom Layer w8: v1(1350,1800) 1385,1800 1390,1795 v1(1420,1795)
UMCU_P: R31.1 R37.1 U6.26 | length 377.3
  Top Layer w8: R37.1@1306.77,1875 1469.55,1875 1485,1859.54 1485,1830.09 1471.85,1816.94 1440.49,1816.94 1427.43,1830 1405,1830 1390,1815 R31.1@1390,1763.9
VBUS: C58.1 U6.28 U7.16 | length 76.4
  Top Layer w8: U7.16@1045.12,1815 1116.3,1815 C58.1@1120,1818.7
pads on no net: FD1.1 FD2.1 FD3.1 H1.0 H2.0 H3.0 H4.0 JTAG/DEBUG1.7 U1_M1.18 U1_M1.19 U1_M1.23 U1_M1.27 U1_M2.18 U1_M2.19 U1_M2.23 U1_M2.27 U1_M3.18 U1_M3.19 U1_M3.23 U1_M3.27 U2.6 U2.9 U2.15 U3.18 U3.19 U3.23 U3.27 U6.13 U6.14 U6.15 U6.16 U6.30 U6.36 U6.37 U6.38 U6.39 U6.46 U6.48 U6.74 U6.79 U6.95 U6.98 U6.100
copper on no net:
  other v2: 2948.35,2523.35 2991.65,2523.35 2948.35,2566.65 2991.65,2566.65

## Polygon pours and split planes (outlines as drawn)
NetC67_1 on Top Layer "Bottom Layer-No Net" (solid, remove dead copper, pour order 15): 3150,-5 3150,340 3260,340 3255,345 3255,475 3505,475 3505,300 3420,300 3380,260 3380,-5
NetF1_1 on Top Layer "Bottom Layer-No Net" (solid, remove dead copper, pour order 13): 3550,340 3550,190 3550,-5 3940,-5 4136.54,-5 4139.42,-5 4140,-5 4140,-1.54 4140,850 3750,850 3750,450 3685,450 3685,340
NetD5_C on Top Layer "Bottom Layer-No Net" (solid, remove dead copper, pour order 25): 2910,2150 3080,2150 3080,1905 2865,1905 2865,2060 2910,2060
NetD6_C on Top Layer "Bottom Layer-No Net" (solid, remove dead copper, pour order 23): 2900,2150 2740,2150 2740,2085 2740,2080 2800,2080 2800,1800 2800,1745 2820,1725 2820,1595 3020,1595 3020,1705 2970,1705 2855,1820 2855,1840 2855,2070 2900,2070
GND on Top Layer "Bottom Layer-No Net" (solid, remove dead copper, pour order 15): 3285,2245 3360,2245 3360,2080 3260,2080 3260,1975 3100,1975 3100,2250 3285,2250 3290,2245
+12VCC2 on Top Layer "Bottom Layer-No Net" (solid, remove dead copper, pour order 13): 4125,2235 4125,2425 3825,2425 3760,2360 3755,2355 3745,2345 3455,2345 3400,2345 3400,2315 3465,2315 3465,2260 3580,2260 3605,2235 4125,2235
NetD15_A on Top Layer "SMPS" (solid, pour order 50): 3430.2,2596 3430.2,2460 3430.2,2411 3479.2,2362 3592.2,2362 3616.2,2386 3616.2,2475 3604.2,2487 3587.2,2487 3506.2,2568 3479.2,2595 3433.2,2595
NetC28_2 on Top Layer "SMPS" (solid, pour order 53): 3427.2,2629 3449.97,2606.23 3494.2,2606.23 3600.43,2500 3616.2,2500 3632.2,2484 3632.2,2408 3670.2,2370 3756.2,2370 3774.2,2388 3774.2,2470 3774.2,2583 3728.2,2629 3717.2,2640 3445.2,2640 3430.2,2640 3427.2,2637
GND on Top Layer "SMPS" (solid, pour order 55): 3413.2,2563 3385.2,2535 3297.2,2535 3247.2,2485 3247.2,2362 3372.2,2362 3421.2,2411 3423.2,2413 3423.2,2546 3423.2,2563
GND on Top Layer "Bottom Layer-No Net" (solid, remove dead copper, pour order 8): 3280,1890 3365,1890 3365,1735 3270,1735 3270,1460 3125,1460 3125,1890
NetD7_A on Top Layer "Bottom Layer-No Net" (solid, remove dead copper, pour order 6): 3375,2250 3375,2010 4125,2010 4125,2225 3600,2225 3575,2250 3455,2250 3455,2300 3405,2300 3400,2300 3400,2250
+12VCC3 on Top Layer "Bottom Layer-No Net" (solid, remove dead copper, pour order 4): 3375,2000 3375,1965 3460,1965 3460,1910 3525,1910 3755,1910 3855,1810 4130,1810 4130,2000
NetD9_C on Top Layer "Bottom Layer-No Net" (solid, remove dead copper, pour order 2): 4135,1500 3775,1500 3575,1500 3500,1575 3375,1575 3375,1900 3400,1900 3400,1950 3450,1950 3450,1900 3575,1900 3750,1900 3850,1800 4135,1800
FGND on Groun Plane (split plane): 4118.78,15.08 15.08,15.08 15.08,2780.2 4118.78,2780.2
no net on Power Plane (split plane): 4118.78,15.08 15.08,15.08 15.08,2780.2 4118.78,2780.2

## Keep-outs
Keep-Out Layer:
  lines w10: 10,10 4125,10 4125,2800 10,2800 10,10

## Other copper
Groun Plane (plane layer: these items are gaps in the copper):
  lines w10: 100,375 100,2400 400,2400 400,2700 3690,2700 3750,2700 3750,2400 4065,2400 4065,375 3750,375 3750,65 375,65 ; 375,90 375,400 ; 4996.26,1608.74 5271.26,1608.74

## Silkscreen, mask and mechanical layers (free items; w line width, h text height)
Mechanical 15:
  lines w10: 0,2795.28 4133.86,2795.28 ; 0,2800 0,0 4133.86,0 4133.86,2800

## Text inside footprints (layer, text, board x,y; h text height)
C66: Top Overlay "+" at 2806.5,976.34 h77.5 r90; Top Overlay "+" at 2806.5,889.72 h77.5 r90
FAN-1: Mechanical 16 "1" at 2992.5,1797.5 h62 r90
FAN-2: Mechanical 16 "1" at 2992.5,1482.5 h62 r90
HEATERS1: Top Overlay "1" at 4045,1615 h77.5 r90; Top Overlay "2" at 4045,1800 h77.5 r90; Top Overlay "3" at 4045,2000 h77.5 r90; Top Overlay "4" at 4045,2200 h77.5 r90
MAX1_ES1: Mechanical 16 "1" at 387.5,2322.5 h62
MAX1_ES2: Mechanical 16 "1" at 802.5,2322.5 h62
MAX1_ES3: Mechanical 16 "1" at 1217.5,2321.5 h62
MIN1_ES1: Mechanical 16 "1" at 712.5,2687.5 h62 r180
MIN1_ES2: Mechanical 16 "1" at 1127.5,2687.5 h62 r180
MIN1_ES3: Mechanical 16 "1" at 1542.5,2686.5 h62 r180
P2_U_TR1: Mechanical 16 "1" at 2627.5,2427.5 h62 r90
P2_U_TR2: Mechanical 16 "1" at 2627.5,2112.5 h62 r90
P2_U_TR3: Mechanical 16 "1" at 2627.5,1482.5 h62 r90
P2_U_TR4: Mechanical 16 "1" at 2627.5,1797.5 h62 r90
"PWR INPUT1": Top Overlay "1" at 3735,275 h77.5 r180; Top Overlay "2" at 3550,275 h77.5 r180; Top Overlay "3" at 3350,275 h77.5 r180; Top Overlay "4" at 3150,275 h77.5 r180